# Altium PCB Рогозинский.pcbdoc
Units mil, origin at the board's own origin, x right, y up, seen from the top; angles counter-clockwise.
Board outline 2854.33 x 1858.4 mil, 2 copper layers (Top Layer, Bottom Layer); 43 components, 43 nets, 157 pads, 36 vias.
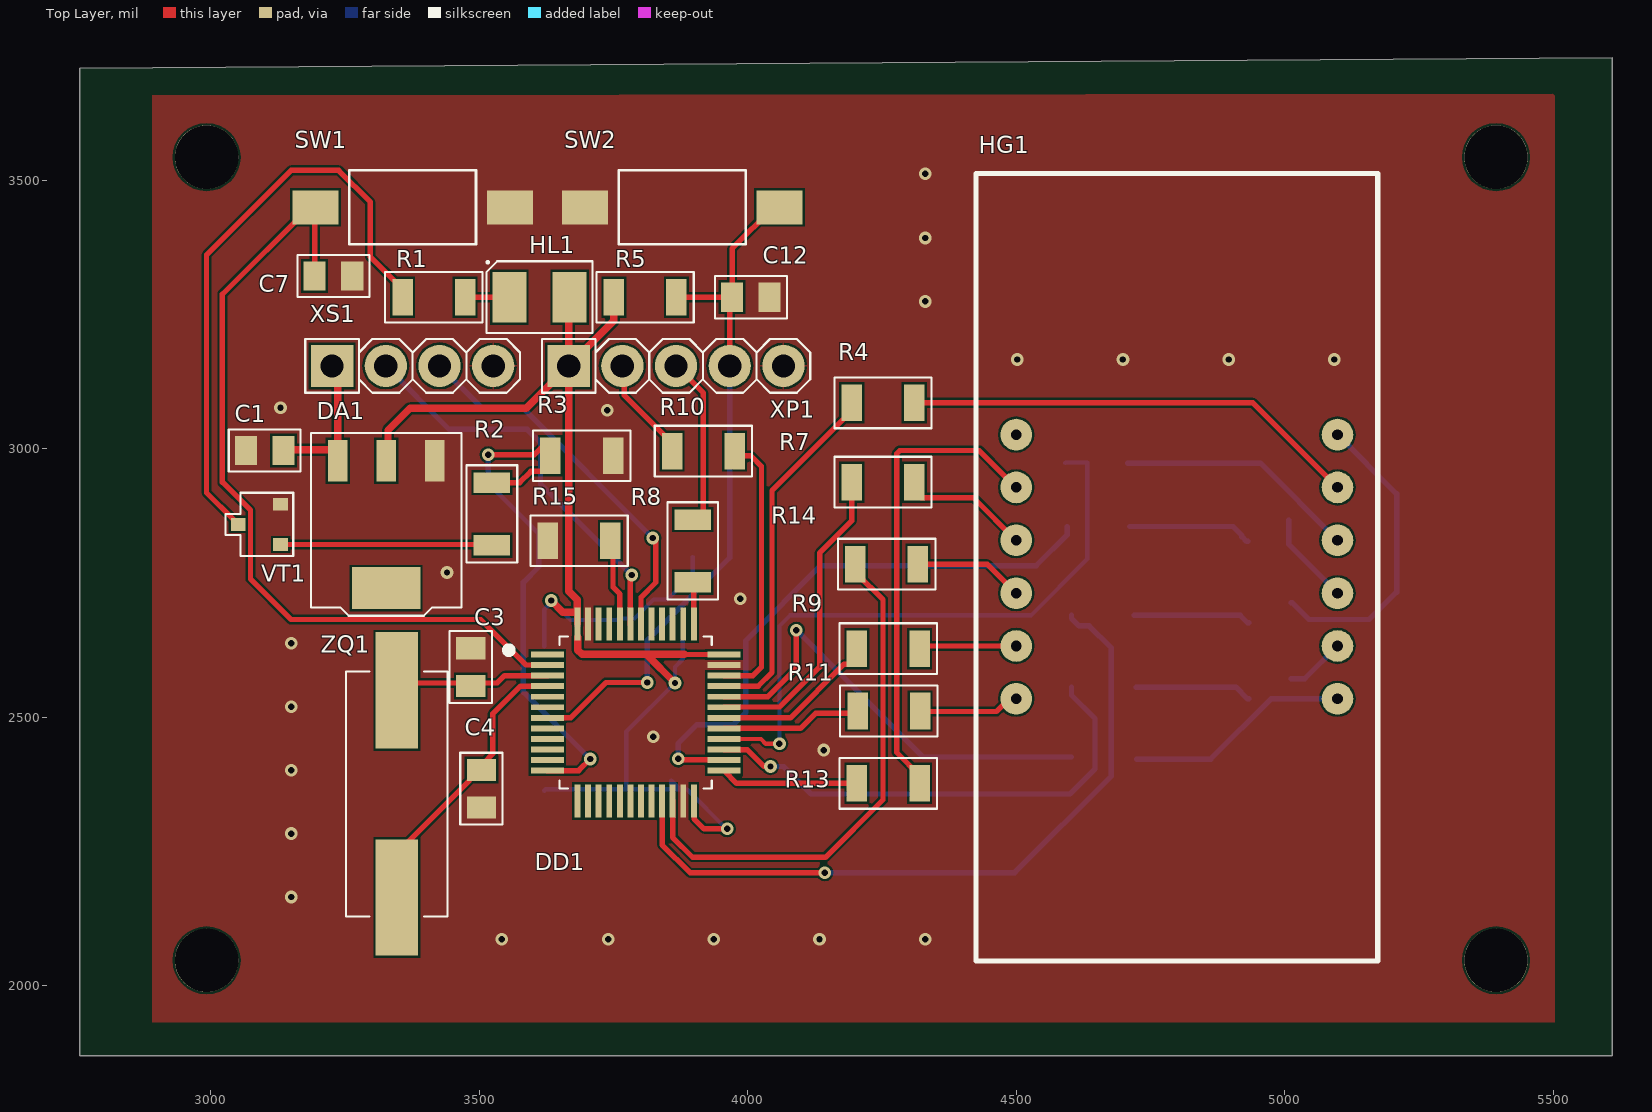
[diagram p0: Top Layer view]
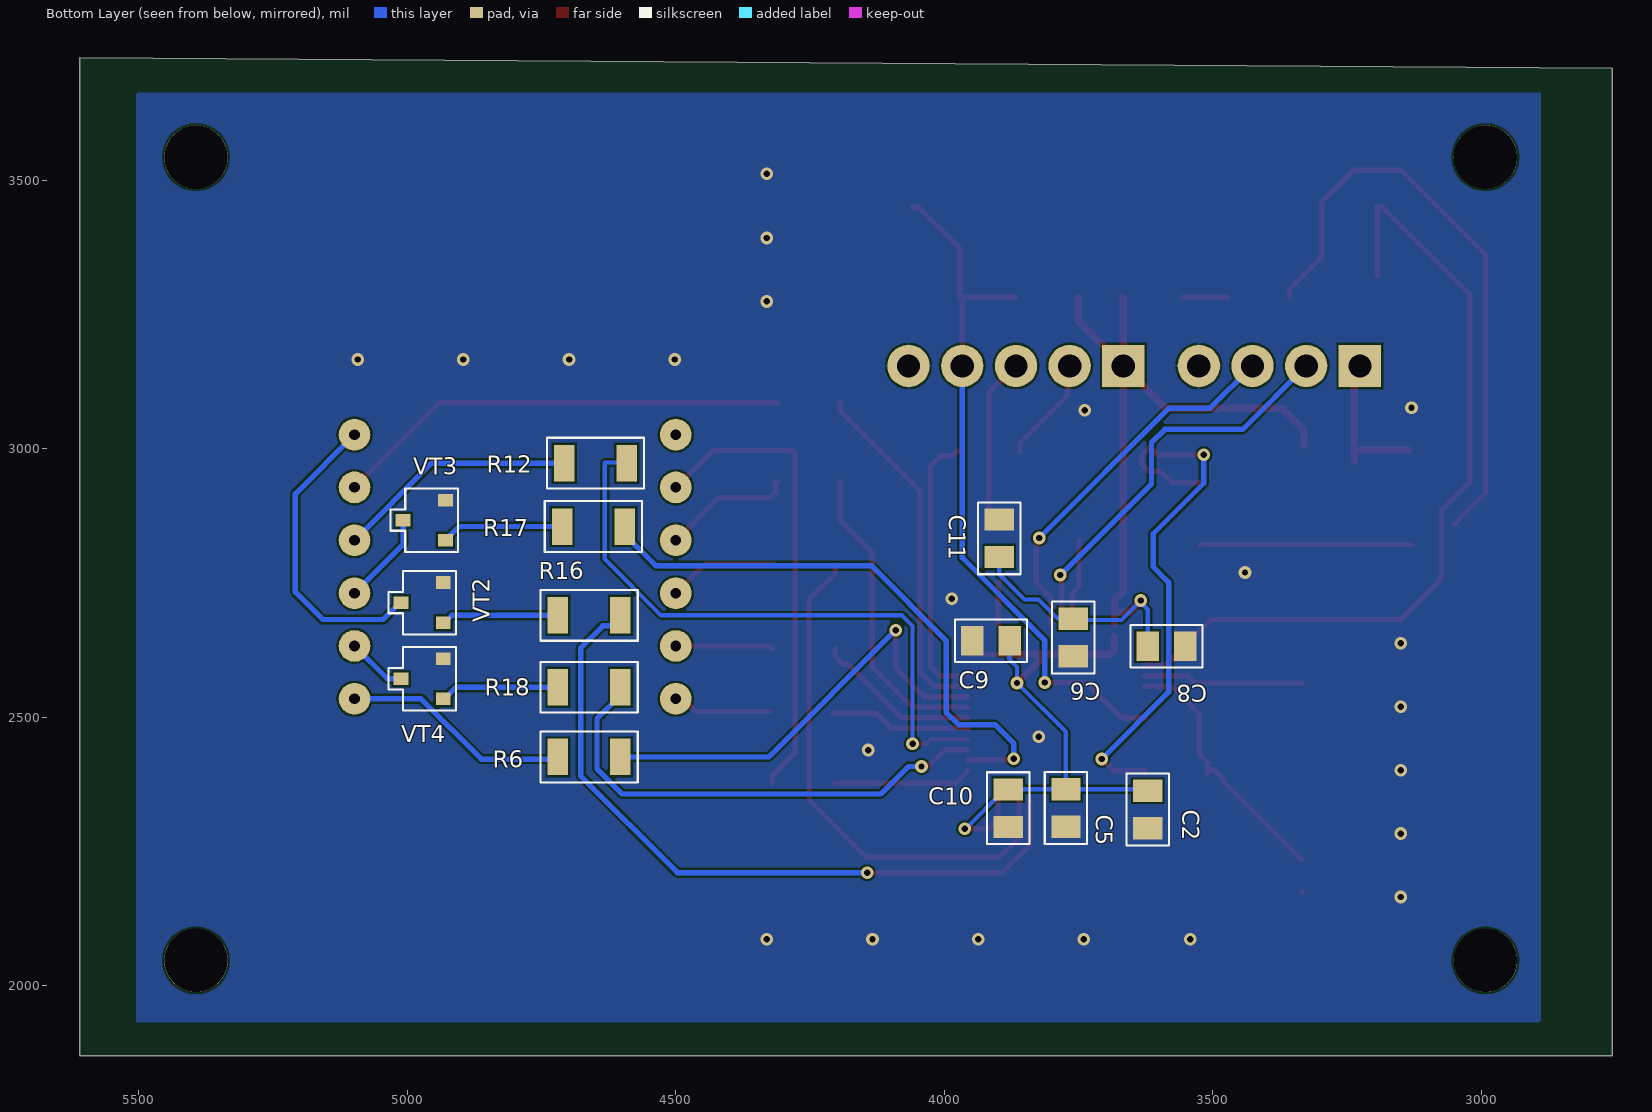
[diagram p1: Bottom Layer view, seen from below]
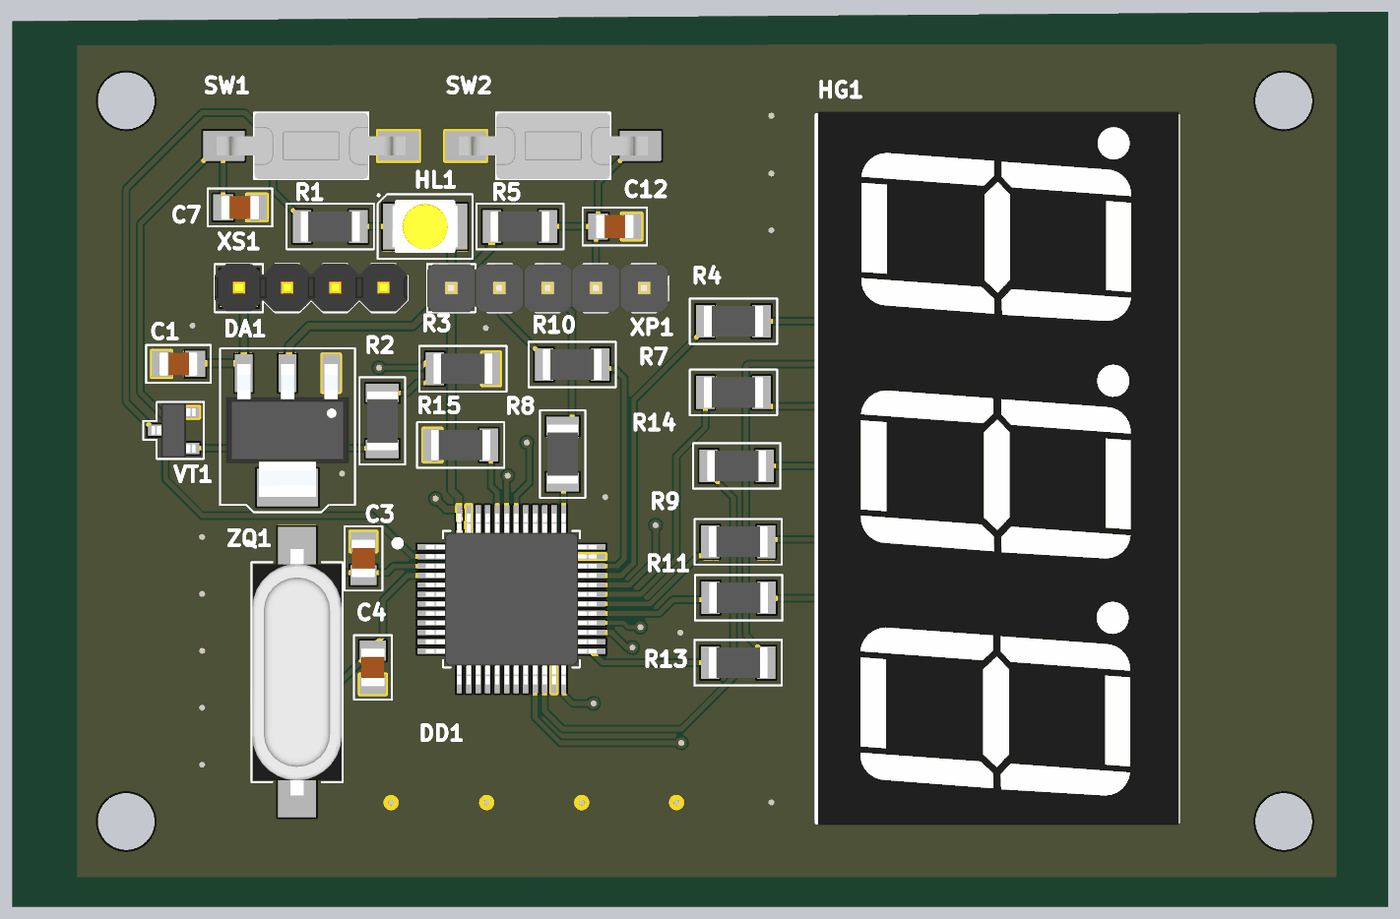
[diagram p2: 3D render of the assembled board from above, using the file's embedded part models]
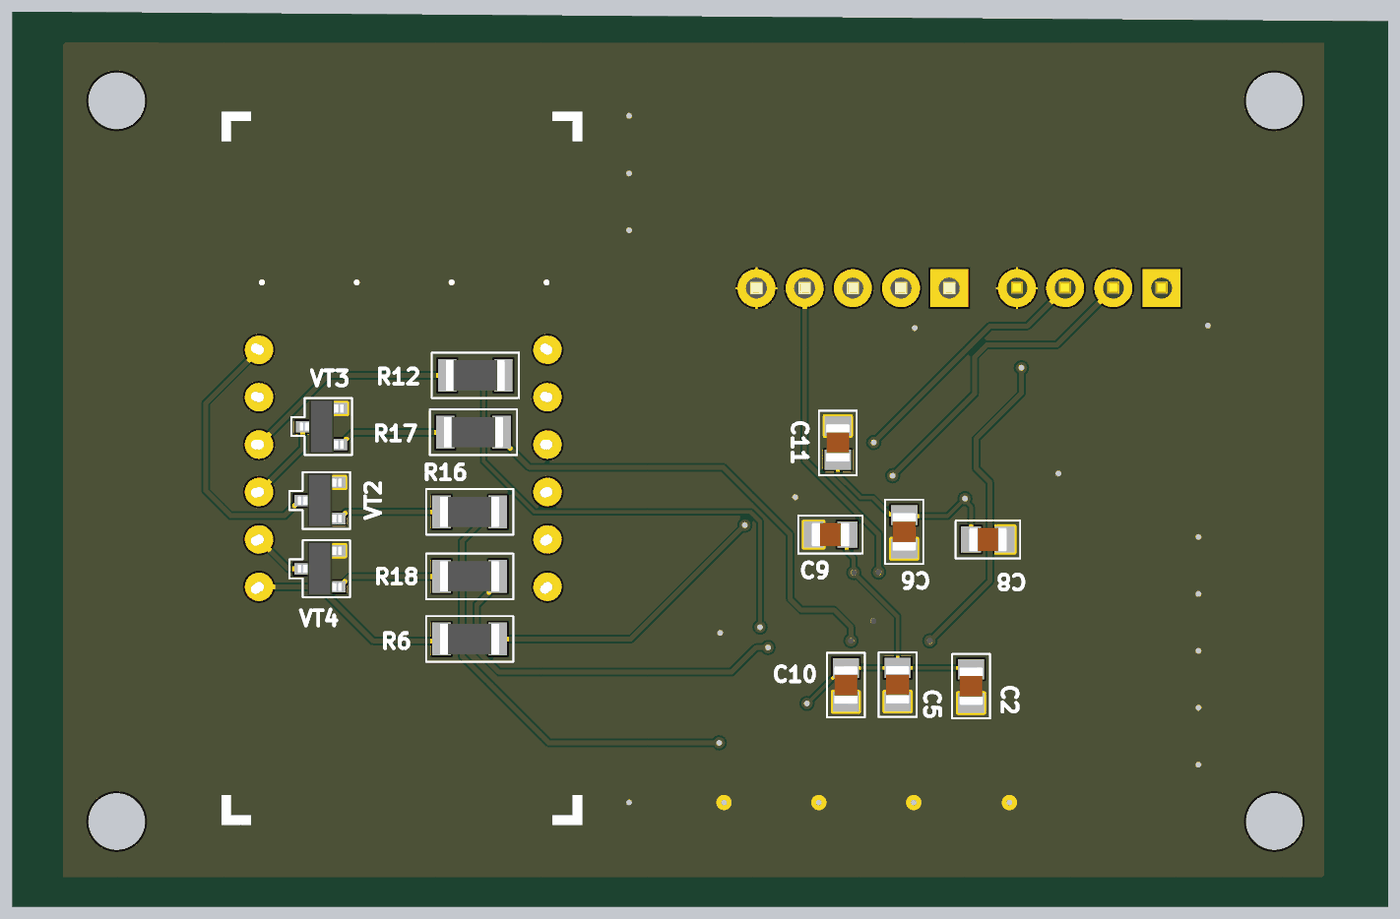
[diagram p3: 3D render of the assembled board from below, using the file's embedded part models]

## Layer stack, top to bottom
Top Solder: solder mask 0.4, Solder Resist, Dk 3.5
Top Layer: signal copper 1.4
Dielectric 1: dielectric 12.6, FR-4, Dk 4.8
Bottom Layer: signal copper 1.4
Bottom Solder: solder mask 0.4, Solder Resist, Dk 3.5

## Board outline
2755.91,1870.08 5610.24,1870.08 5610.24,3728.48 2755.91,3708.42

## Design rules (kind name [scope] priority, off if disabled: settings)
Clearance [All] p1: gap=3.94 ignorepadtopadclearanceinfootprint=FALSE except(0: Arc-Hole Track-Hole SMDPad-Hole THPad-Hole Via-Hole Fill-Hole Poly-Hole Region-Hole Text-Hole)
PolygonConnect [All] p1: thpad.connectstyle=Relief thpad.reliefconductorwidth=3.94 thpad.reliefentries=4 thpad.polygonreliefangle="90 Angle" thpad.airgapwidth=3.94 smdpad.connectstyle=Direct smdpad.reliefconductorwidth=10 smdpad.reliefentries=4 smdpad.polygonreliefangle="90 Angle" smdpad.airgapwidth=10 via.connectstyle=Direct via.reliefconductorwidth=3.94 via.reliefentries=4 via.polygonreliefangle="90 Angle" via.airgapwidth=3.94
RoutingTopology [All] p1: topology=Daisy_Simple
RoutingVias [All] p1: holewidth=28 width=50 viastyle="Through Hole" minholewidth=28 minwidth=50 maxholewidth=28 maxwidth=50
SolderMaskExpansion [All] p1: expansion=4 istentingtop=FALSE
Width [All] p1: maxlimit=13.78 minlimit=7.87 preferedwidth=7.87 minimp=50.000000 maximp=50.000000 favimp=50.000000
29 further rules are at their usual default settings.

## Components (designator, comment, footprint, x,y, rotation, side; value= is the part's Value field where it differs from the comment)
C1 "1 мкФ" Capfcitor0805Murata 3100.39,2997.05 r0 top
C2 "4.7 мкФ" Capfcitor0805Murata 3621.06,2328.23 r90 bottom
C3 "12 пФ" Capfcitor0805Murata 3484.25,2593.5 r90 top
C4 "12 пФ" Capfcitor0805Murata 3503.94,2367.13 r270 top
C5 "4.7 мкФ" Capfcitor0805Murata 3773.62,2331.18 r90 bottom
C6 "100 нФ" Capfcitor0805Murata 3759.84,2648.62 r90 bottom
C7 "100 нФ" Capfcitor0805Murata 3228.35,3321.85 r180 top
C8 "100 нФ" Capfcitor0805Murata 3586.22,2632.48 r0 bottom
C9 "100 нФ" Capfcitor0805Murata 3912.91,2642.72 r180 bottom
C10 "100 нФ" Capfcitor0805Murata 3880.91,2330.71 r90 bottom
C11 "100 нФ" Capfcitor0805Murata 3897.64,2833.35 r270 bottom
C12 "100 нФ" Capfcitor0805Murata 4005.91,3282.48 r180 top
DA1 "LDL1117S33R" Stab 3326.77,2859.25 r270 top
DD1 "STM32F103C8T6" STM32F103C8T6 3791.34,2508.86 r0 top
HG1 "7segment" 7segment 4799.21,2784.45 r90 top
HL1 "KA-3528SURC" LED3528 3612.2,3282.48 r180 top
R1 "Resistor" Resistor1206 3415.35,3282.48 r0 top
R2 "Resistor" Resistor1206 3523.62,2878.94 r270 top
R3 "Resistor" Resistor1206 3690.94,2987.2 r180 top
R4 "Resistor" Resistor1206 4251.97,3085.63 r180 top
R5 "Resistor" Resistor1206 3809.05,3282.48 r180 top
R6 "Resistor" Resistor1206 4661.42,2426.18 r180 bottom
R7 "Resistor" Resistor1206 4251.97,2937.99 r180 top
R8 "Resistor" Resistor1206 3917.32,2995.87 r180 top
R9 "Resistor" Resistor1206 4261.81,2627.95 r180 top
R10 "Resistor" Resistor1206 3897.64,2810.04 r90 top
R11 "Resistor" Resistor1206 4262.8,2511.81 r180 top
R12 "Resistor" Resistor1206 4649.61,2973.43 r180 bottom
R13 "Resistor" Resistor1206 4261.81,2376.97 r180 top
R14 "Resistor" Resistor1206 4258.86,2785.43 r180 top
R15 "Resistor" Resistor1206 3686.02,2828.74 r0 top
R16 "Resistor" Resistor1206 4661.42,2689.96 r180 bottom
R17 "Resistor" Resistor1206 4653.54,2855.32 r180 bottom
R18 "Resistor" Resistor1206 4661.42,2556.1 r180 bottom
SW1 "Button" Button 3375.98,3449.8 r0 top
SW2 "Button" Button 3877.95,3449.8 r180 top
VT1 "BC847" TransistorBC847 3090.55,2859.25 r180 top
VT2 "BC847" TransistorBC847 4972.44,2713.58 r0 bottom
VT3 "BC847" TransistorBC847 4968.5,2867.13 r0 bottom
VT4 "BC847" TransistorBC847 4972.44,2571.85 r0 bottom
XP1 "PLS-5" PLS-5 3866.54,3154.53 r0 top
XS1 "PLS-4" PLS-4 3375.98,3154.53 r0 top
ZQ1 "8MHz" Quartz 3346.46,2357.28 r90 top

## Footprints (in the part's own frame and the unit in brackets; to place one, negate y for a bottom-side part, rotate by r counter-clockwise, add the part's x,y. Pads: shape width x height; smd on the part's side, far side on the other; paste and mask are expansions set on the pad)
7segment [mm]
  round 1.5 hole 0.5: 1(-6.35,7.6) 2(-3.85,7.6) 3(-1.35,7.6) 4(1.15,7.6) 5(3.65,7.6) 6(6.15,7.6) 7(-6.35,-7.6) 8(-3.85,-7.6) 9(-1.35,-7.6) 10(1.15,-7.6) 11(3.65,-7.6) 12(6.15,-7.6)
  silkscreen extent -18.75,-9.5 18.5,9.5, body extent -18.9,-9.57 18.7,9.43, height 7.1
Button [mm]
  rect 2.18x1.6 smd: 1(-4.6,0) 2(4.6,0)
  silkscreen extent -3,-1.75 3,1.75, body extent -4.98,-1.75 4.98,1.75, height 4.4
Capfcitor0805Murata [mm]
  rect 1.05x1.38 smd: 1(-0.888,0) 2(0.888,0)
  silkscreen extent -1.7,-1 1.7,1, body extent -1,-0.62 1,0.62, height 0.7
LED3528 [mm]
  rect 1.6x2.4 smd: 1(-1.425,0) 2(1.425,0)
  silkscreen extent -2.5,-1.7 2.5,1.7, body extent -1.75,-1.4 1.75,1.4, height 1.9
PLS-4 [mm] "PLS-40 4 pin header"
  rect 2x2 hole 1.1: 1(-3.81,0)
  round 2 hole 1.1: 2(-1.27,0) 3(1.27,0) 4(3.81,0)
  silkscreen extent -5.08,-1.27 5.08,1.27, body extent -5.08,-1.24 5.08,1.3, height 8.6
PLS-5 [mm]
  rect 2x2 hole 1.1: 1(-5.08,0)
  round 2 hole 1.1: 2(-2.54,0) 3(0,0) 4(2.54,0) 5(5.08,0)
  silkscreen extent -6.35,-1.27 6.35,1.27, body extent -6.35,-1.27 6.35,1.27, height 8.54
Quartz [mm]
  rect 5.5x2 smd: 1(-4.9,0) 2(4.9,0)
  silkscreen extent -5.8,-2.4 5.8,2.4, body extent -6.5,-2.35 6.5,2.35, height 4.1
Resistor1206 [mm]
  rect 0.97x1.73 smd: 1(-1.48,0) 2(1.48,0)
  silkscreen extent -2.3,-1.2 2.3,1.2, body extent -1.55,-0.8 1.55,0.8, height 0.64
Stab [mm]
  rect 1.98x0.93 smd: 1(-3.015,2.3) 2(-3.015,0) 3(-3.015,-2.3)
  rect 1.98x3.23 smd: 4(3.015,0)
  silkscreen extent -4.32,-3.56 4.32,3.56, body extent -3.5,-3.25 3.5,3.25, height 1.8
STM32F103C8T6 [mm]
  rect 1.56x0.28 smd: 1(-4.18,2.75) 2(-4.18,2.25) 3(-4.18,1.75) 4(-4.18,1.25) 5(-4.18,0.75) 6(-4.18,0.25) 7(-4.18,-0.25) 8(-4.18,-0.75) 9(-4.18,-1.25) 10(-4.18,-1.75) 11(-4.18,-2.25) 12(-4.18,-2.75) 25(4.18,-2.75) 26(4.18,-2.25) 27(4.18,-1.75) 28(4.18,-1.25) 29(4.18,-0.75) 30(4.18,-0.25) 31(4.18,0.25) 32(4.18,0.75) 33(4.18,1.25) 34(4.18,1.75) 35(4.18,2.25) 36(4.18,2.75)
  rect 0.28x1.56 smd: 13(-2.75,-4.18) 14(-2.25,-4.18) 15(-1.75,-4.18) 16(-1.25,-4.18) 17(-0.75,-4.18) 18(-0.25,-4.18) 19(0.25,-4.18) 20(0.75,-4.18) 21(1.25,-4.18) 22(1.75,-4.18) 23(2.25,-4.18) 24(2.75,-4.18) 37(2.75,4.18) 38(2.25,4.18) 39(1.75,4.18) 40(1.25,4.18) 41(0.75,4.18) 42(0.25,4.18) 43(-0.25,4.18) 44(-0.75,4.18) 45(-1.25,4.18) 46(-1.75,4.18) 47(-2.25,4.18) 48(-2.75,4.18)
  silkscreen extent -6.15,-3.6 3.6,3.6, body extent -4.5,-4.5 4.5,4.5, height 1.57
TransistorBC847 [mm]
  rect 0.7x0.6 smd: B(-1,0.95) C(1,0) E(-1,-0.95)
  silkscreen extent -1.6,-1.5 1.6,1.5, body extent -1.15,-1.45 1.15,1.45, height 1.1

## Part data
C1 C2 C3 C4 C5 C6 C7 C8 C9 C10 C11 C12: library part Capacitor
XP1: CurrentMax=3A, Manufacturer=Connfly, ValueManufacturerPartNumber="Connector, 5pin, 2.54mm, 500VAC, 3A", VoltageMax=500VAC, HelpURL=https://www.chipdip.ru/product/pls-5, Multichannel=5pin, PartNumber=PLS-5, Pitch=2.54mm, TypeConnector=Connector
XS1: CurrentMax=3A, Manufacturer=Connfly, ValueManufacturerPartNumber="Connector, 4pin, 2.54mm, 500VAC, 3A", VoltageMax=500VAC, HelpURL=https://www.chipdip.ru/product/pls-4, Multichannel=4pin, PartNumber=PLS-4, Pitch=2.54mm, TypeConnector=Connector
ZQ1: library part 8.000MHzHC-49SM

## Free pads (board coordinates)
  round 118.11 hole 118.11 unplated: 2(2992.13,3543.31) 3(5393.7,3543.31) 4(5393.7,2047.24) 5(2992.13,2047.24)

## Via types
v1: diameter 23.62, hole 11.81, Top Layer to Bottom Layer, tented both sides, 32 vias
v2: diameter 23.62, hole 11.81, Top Layer to Bottom Layer, 4 vias

## Nets (pads, with @x,y where several pads share a name; then routed paths per layer and width w, separated by ;. In a path a pad name is that pad's centre, name@x,y a point inside that pad or via, vN(x,y) a via of type N, cw(c..) or ccw(c..) an arc to the next point about the centre after c; other vN are vias at no path point)
+3.3: C2.2 C5.2 C6.2 C8.2 C9.2 C10.2 C11.2 DA1.2 DD1.24 DD1.36 DD1.48 HL1.1 R5.2 XP1.1 | length 2913.3
  Top Layer w9.84: 3881.69,2617.13 DD1.36
  Top Layer w10: DD1.24 3900.12,2343.78 3900.12,2310.86 3918.66,2292.32 v1(3961.61,2292.32)
  Top Layer w13.78: DA1.2@3330.12,3007.48 3330.12,3034.84 3371.06,3075.79 3587.8,3075.79 XP1.1 ; v1(3633.86,2717.52) 3655.74,2695.64 3681.69,2695.64 DD1.48@3682.38,2694.95 ; HL1.1 3666.54,3280.71 XP1.1 ; DD1.48 3683.07,2694.26 DD1.48@3682.38,2694.95 ; DD1.48@3683.58,2649.61 3683.58,2625.2 3691.65,2617.13 3881.69,2617.13 ; R5.2 3750.79,3238.78 XP1.1 ; 3812.62,2615.94 v1(3864.59,2563.98) ; XP1.1 3666.82,3154.24 3666.82,2734.75 3682.38,2719.19 DD1.48@3682.38,2694.95
  Bottom Layer w7.87: C2.2 3624.02,2366.14 C5.2 ; C8.2 3621.18,2700.58 3633.86,2713.26 v1(3633.86,2717.52) 3670.28,2681.1 3757.36,2681.1 C6.2 3760.31,2684.06 3789.37,2684.06 3824.8,2719.49 3850.39,2719.49 3880.26,2749.35 3880.57,2749.35 3897.64,2766.42 C11.2 ; C10.2@3857.68,2376.38 3857.68,2382.4 3860.69,2379.39 C10.2@3873.94,2366.14 ; C9.2 3878.94,2641.73 3878.94,2608.27 3864.59,2593.92 v1(3864.59,2563.98) 3773.62,2473.01 C5.2 ; v1(3961.61,2292.32) 3960.75,2292.32 3887.4,2365.67 C10.2 ; C5.2 C10.2@3873.94,2366.14 ; C10.2@3873.94,2366.14 3874.41,2365.67 C10.2 ; C10.2@3873.94,2366.14 3880.43,2366.14 C10.2
  Bottom Layer w10: XP1.1 XP1.1@3681.1,3139.96
+5: C1.2 DA1.3 XS1.1 | length 282.3
  Top Layer w13.78: C1.2 3136.93,2998.62 DA1.3@3236.22,2998.62 ; XS1.1 3236.22,3144.29 DA1.3
GND: C1.1 C2.1 C3.2 C4.2 C5.1 C6.1 C7.1 C8.1 C9.1 C10.1 C11.1 C12.1 DA1.1 DD1.23 DD1.35 DD1.47 R3.1 R15.1 SW1.2 SW2.2 VT1.E VT2.E VT3.E VT4.E XP1.5 XS1.4
  other v1: 4330.71,2086.61 3149.61,2165.35 3149.61,2283.46 3149.61,2401.57 4141.73,2438.98 3823.82,2463.58 3149.61,2519.68 3149.61,2637.8 3985.92,2720.68 3439.96,2769.69 3738.19,3071.85 3129.92,3076.77 4501.97,3166.34 4698.82,3166.34 4895.67,3166.34 5092.52,3166.34 4330.71,3274.61 4330.71,3392.72 4330.71,3512.15
  other v2: 3541.69,2086.61 3740.16,2086.61 3937.01,2086.61 4133.86,2086.61
NetC3_1: C3.1 DD1.3 ZQ1.2 | length 298.9
  Top Layer w10: ZQ1.2@3333.58,2563.98 3533.46,2563.98 3547.24,2577.76 DD1.3
NetC4_1: C4.1 DD1.4 ZQ1.1 | length 483.9
  Top Layer w10: ZQ1.1@3333.58,2234.17 3481.77,2382.36 3481.77,2386.42 3497.44,2402.09 C4.1 ; C4.1@3509.37,2394.33 3509.37,2416.34 3525.04,2432.01 3525.04,2506.34 3576.77,2558.07 DD1.4
NetC7_2: C7.2 DD1.2 SW1.1 | length 1540
  Top Layer w10: C7.2 3193.39,3448.31 SW1.1 3183.47,3449.8 3021.65,3287.99 3021.65,2937.99 3073.9,2885.75 3073.9,2757.8 3149.61,2682.09 3502.56,2682.09 3587.2,2597.44 DD1.2
NetC12_2: C12.2 DD1.7 R5.1 SW2.1 XP1.4 | length 1310.6
  Top Layer w10: DD1.7 3627.28,2499.53 3670.57,2499.53 3736.01,2564.96 v1(3812.99,2564.96) ; R5.1 C12.2 ; XP1.4 3966.54,3278.07 C12.2 ; SW2.1 4047.64,3449.8 3970.94,3373.11 C12.2
  Bottom Layer w10: v1(3812.99,2564.96) 3812.99,2643.74 3966.54,2797.28 XP1.4
NetDD1_12: DD1.12 R2.1 R3.2 | length 1025.1
  Top Layer w10: v1(3516.73,2989.17) 3602.82,2989.17 3616.77,3003.12 R3.2 3632.68,2972.24 3618.58,2958.15 3596.1,2958.15 3575.16,2937.2 R2.1 ; DD1.12 3685.04,2400.59 v1(3706.69,2422.24)
  Bottom Layer w10: v1(3516.73,2989.17) 3516.73,2935.95 3610.79,2841.89 3610.79,2780.16 3582.13,2751.49 3582.13,2546.81 v1(3706.69,2422.24)
NetDD1_21: DD1.21 R16.2 | length 1355.2
  Top Layer w10: DD1.21 3840.55,2262.55 3892.47,2210.63 v1(4143.7,2210.63)
  Bottom Layer w10: v1(4143.7,2210.63) 4497.05,2210.63 4677.17,2390.75 4677.17,2628.94 4635.83,2670.28 4617.24,2670.28 4603.15,2684.37 R16.2
NetDD1_22: DD1.22 R14.2 | length 976.4
  Top Layer w10: DD1.22 3860.23,2276.58 3897.64,2239.17 4144.68,2239.17 4251.97,2346.46 4251.97,2719.09 4202.91,2768.15 R14.2@4202.91,2783.11
NetDD1_25: DD1.25 R13.2 | length 257.4
  Top Layer w10: DD1.25 3979.53,2376.97 R13.2
NetDD1_26: DD1.26 R17.2 | length 1094.4
  Top Layer w10: v1(3870.41,2422.58) 3872.2,2420.79 3955.39,2420.79 DD1.26
  Bottom Layer w10: v1(3870.41,2422.58) 3870.41,2451.12 3905.51,2486.22 3973.43,2486.22 3996.46,2509.25 3996.46,2643.11 4135.83,2782.48 4537.4,2782.48 4595.28,2840.35 R17.2
NetDD1_27: DD1.27 R18.2 | length 914.6
  Top Layer w10: DD1.27 3956.42,2439.45 3999.71,2439.45 4030.69,2408.46 v1(4042.41,2408.46)
  Bottom Layer w10: v1(4042.41,2408.46) 4066.81,2408.46 4117.99,2357.28 4600.04,2357.28 4646.74,2403.99 4646.74,2497.55 4603.15,2541.14 R18.2
NetDD1_28: DD1.28 R12.2 | length 1172.5
  Top Layer w7.87: DD1.28 4024.61,2459.65 4033.46,2450.79 v1(4059.06,2450.79)
  Bottom Layer w7.87: v1(4059.06,2450.79) 4059.06,2670.28 4078.74,2689.96 4527.56,2689.96 4632.35,2794.75 4632.35,2974.59 4592.5,2974.59 R12.2
NetDD1_29: DD1.29 R11.2 | length 262.4
  Top Layer w10: DD1.29 4098.43,2479.33 4126.97,2507.87 R11.2@4206.5,2507.87
NetDD1_30: DD1.30 R9.2 | length 309.8
  Top Layer w10: DD1.30 4079.72,2499.02 4179.61,2598.9 4189.45,2598.9 4203.54,2612.99 R9.2
NetDD1_31: DD1.31 R7.2 | length 578.2
  Top Layer w10: DD1.31 3956.42,2519.21 4059.57,2519.21 4133.86,2593.5 4133.86,2806.14 4193.7,2865.99 R7.2
NetDD1_32: DD1.32 R6.2 | length 838
  Top Layer w10: DD1.32 4037.4,2538.39 4090.55,2591.54 v1(4090.55,2662.4)
  Bottom Layer w10: v1(4090.55,2662.4) 4326.77,2426.18 R6.2
NetDD1_33: DD1.33 R4.2 | length 663.4
  Top Layer w10: DD1.33 4019.69,2558.07 4045.28,2583.66 4045.28,2922.24 4193.7,3070.67 R4.2
NetDD1_34: DD1.34 R8.1 | length 512
  Top Layer w10: DD1.34 4009.84,2577.76 4025.59,2593.5 4025.59,2967.52 4005.91,2987.2 3984.25,2987.2 R8.1
NetDD1_37: DD1.37 R10.1 | length 79.2
  Top Layer w10: R10.1 3899.6,2749.8 DD1.37
NetDD1_42: DD1.42 XS1.3 | length 704.2
  Top Layer w10: DD1.42 3801.18,2723.42 3828.74,2750.98 3828.74,2828.43 v1(3823.17,2834)
  Bottom Layer w10: XS1.3 3504.72,3075.79 3581.38,3075.79 v1(3823.17,2834)
NetDD1_43: DD1.43 XS1.2 | length 756.7
  Top Layer w10: DD1.43 3781.49,2762.79 v1(3783.8,2765.1)
  Bottom Layer w10: XS1.2 3444.09,3036.42 3589.29,3036.42 3614,3011.71 3614,2934.9 v1(3783.8,2765.1)
NetDD1_44: DD1.44 R15.2 | length 162.2
  Top Layer w10: R15.2@3749.02,2830.35 3749.02,2742.52 3761.81,2729.72 DD1.44
NetHG1_1: HG1.1 R11.1 | length 183.8
  Top Layer w10: R11.1@4325.98,2510.83 4463.1,2510.83 4486.72,2534.45 HG1.1
NetHG1_2: HG1.2 R9.1 | length 182
  Top Layer w10: R9.1 4325,2632.87 HG1.2
NetHG1_3: HG1.3 R14.1 | length 205.3
  Top Layer w10: R14.1 4445.86,2785.43 HG1.3
NetHG1_4: HG1.4 R7.1 | length 246.1
  Top Layer w10: R7.1 4314.96,2937.99 4314.96,2918.31 4324.33,2908.94 4420.79,2908.94 HG1.4
NetHG1_5: HG1.5 R13.1 | length 885.2
  Top Layer w10: R13.1 4320.08,2391.93 4277.56,2434.45 4277.56,2991.19 4283.42,2997.05 4431.1,2997.05 HG1.5
NetHG1_7: HG1.7 R6.1 | length 420.5
  Bottom Layer w10: R6.1@4724.41,2422.24 4862.3,2422.24 4974.5,2534.45 HG1.7
NetHG1_8: HG1.8 VT4.C | length 111.9
  Bottom Layer w10: VT4.C 5037.4,2571.85 HG1.8
NetHG1_9: HG1.9 VT3.C | length 173.3
  Bottom Layer w10: VT3.C 5007.87,2821.85 HG1.9
NetHG1_10: HG1.10 R12.1 | length 450.1
  Bottom Layer w10: R12.1 4954.72,2973.43 HG1.10
NetHG1_11: HG1.11 R4.1 | length 853.4
  Top Layer w10: R4.1 4940.95,3085.63 HG1.11
NetHG1_12: HG1.12 VT2.C | length 570.1
  Bottom Layer w10: VT2.C 5013.78,2713.58 5045.28,2682.09 5157.48,2682.09 5208.66,2733.27 5208.66,2916.34 HG1.12
NetHL1_2: HL1.2 R1.2 | length 82.5
  Top Layer w10: R1.2 HL1.2
NetR1_1: R1.1 VT1.C | length 1124.3
  Top Layer w10: VT1.C 3049.21,2859.25 3042.4,2866.06 3042.4,2868.03 2992.13,2918.31 2992.13,3361.22 3149.61,3518.7 3238.19,3518.7 3297.24,3459.65 3297.24,3357.28 3357.09,3297.44 R1.1
NetR2_2: R2.2 VT1.B | length 394.2
  Top Layer w10: VT1.B 3522.44,2821.85 R2.2
NetR8_2: R8.2 XP1.2 | length 197
  Top Layer w10: XP1.2 3769.72,3151.34 3769.72,3100.16 3859.05,3010.83 R8.2
NetR10_2: R10.2 XP1.3 | length 292.3
  Top Layer w10: XP1.3 3917.32,3103.74 R10.2@3917.32,2883.27
NetR16_1: R16.1 VT2.B | length 219.1
  Bottom Layer w10: R16.1 4917.33,2689.96 4931.1,2676.18 VT2.B
NetR17_1: R17.1 VT3.B | length 231.8
  Bottom Layer w10: R17.1 4903.55,2855.32 4920.35,2838.51 4920.35,2836.54 4929.13,2827.76 VT3.B@4931.1,2827.76
NetR18_1: R18.1 VT4.B | length 218.4
  Bottom Layer w10: R18.1@4723.62,2556.1 4909.45,2556.1 4931.1,2534.45 VT4.B
pads on no net: DA1.4 DD1.1 DD1.5 DD1.6 DD1.8 DD1.9 DD1.10 DD1.11 DD1.13 DD1.14 DD1.15 DD1.16 DD1.17 DD1.18 DD1.19 DD1.20 DD1.38 DD1.39 DD1.40 DD1.41 DD1.45 DD1.46 HG1.6

## Polygon pours and split planes (outlines as drawn)
GND on Top Layer "NONET_L01_P-001" (solid, pour order 15): 2890.75,3658.59 2890.75,1932.21 5503.94,1932.21 5503.35,1932.8 5503.35,3661.54
no net on Top Layer "NONET_L01_P-001" (solid, pour order 14): 2886.81,3663.39
no net on Top Layer "NONET_L01_P-001" (solid, pour order 13): 3908.46,3270.67
GND on Top Layer "NONET_L01_P-001" (solid, pour order 10): 5759.84,3350.39
GND on Top Layer "NONET_L01_P-001" (solid, pour order 9): 6122.05,3173.23
GND on Top Layer "GND_L01_P004" (solid, pour order 4): 8228.35,2480.32
GND on Bottom Layer "NONET_L01_P-001" (solid, pour order 11): 2886.81,3663.39 2888.78,3661.42 2888.78,1935.04 2891.73,1932.09 5504.92,1932.09 5504.92,3664.37
no net on Bottom Layer "NONET_L02_P002" (solid, pour order 2): 984.25,5000
GND on Bottom Layer "GND_L02_P001" (solid, pour order 1): 2519.68,2125.98

## Silkscreen, mask and mechanical layers (free items; w line width, h text height)
Board:
  rectangle: 2873.03,1917.32 5521.65,3678.15